# EAGLE board microsd-adapter (EAGLE 7.5.0)
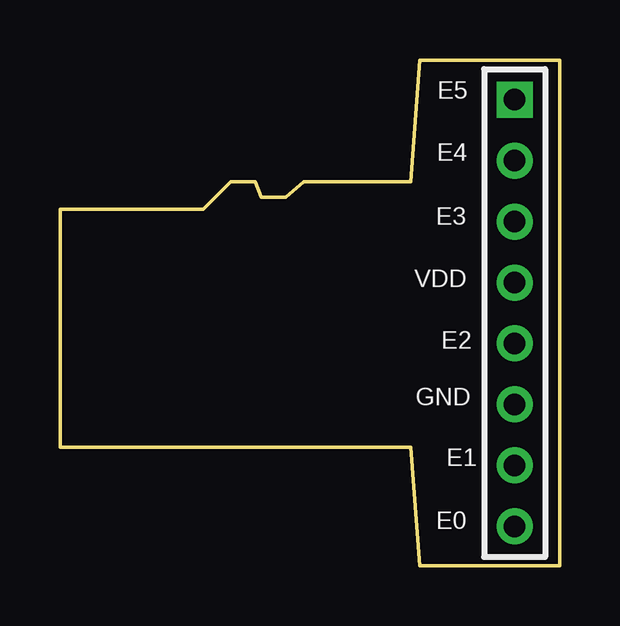
[diagram p0: board, top side]
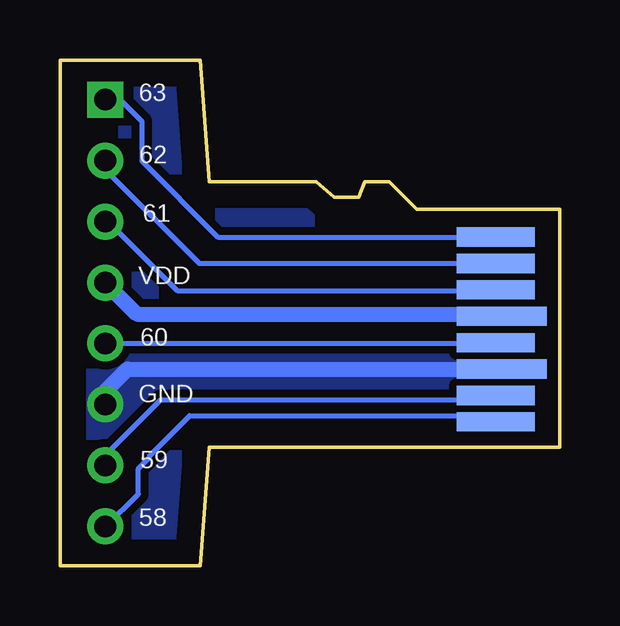
[diagram p1: board, bottom side, seen from below]

Size 20.83 x 21.08 mm. Coordinates in mm from the lower left corner, seen from the top.
Outline: 0,4.95 14.61,4.95 14.99,0 20.83,0 20.83,21.08 14.99,21.08 14.61,16 10.16,16 9.4,15.37 8.38,15.37 8.13,16 7.11,16 5.97,14.86 0,14.86 0,4.95
Copper layers (1*16): Top 0.035mm / dielectric 1.5mm / Bottom 0.035mm
Design rules "default *": minimum track width 10mil, minimum drill 0.61mm, track to track 8mil, track to pad 8mil, pad to pad 8mil, via to via 8mil, smd to smd 8mil, copper to edge 40mil, drill to drill 8mil, minimum pad ring 0mil, minimum via ring 8mil, stop-mask expansion 2mil, vias tented up to drill 19mil, thermal gap 10mil
Net classes: 0 Default: width 0.203 mm, clearance 0.203 mm

## Footprints (pad centres in the part's own frame; a part is rotated, then mirrored left to right if it is on the bottom)
MICROSD_BARE = smd 3.25 x 0.8: 1 0,3.85; 2 0,2.75; 3 0,1.65; 5 0,-0.55; 7 0,-2.75; 8 0,-3.85 | smd 3.75 x 0.8: 4 0.25,0.55; 6 0.25,-1.65
HDR-1x8 = drill 0.9 pad 1.5 square: 1 -8.89,0 | drill 0.9 pad 1.5: 2 -6.35,0; 3 -3.81,0; 4 -1.27,0; 5 1.27,0; 6 3.81,0; 7 6.35,0; 8 8.89,0

## Placement (x,y rotation side)
U1  MICROSD_BARE  [MICROSD_BARE]  2.67,9.86 0 bottom
U2  1X8 CONNECTOR  [HDR-1x8]  18.94,10.54 270 top

## Library data of the parts
U1 U2 = common

## Nets
CLK: U1.5 U2.5
CMD: U1.3 U2.3
DAT0: U1.7 U2.7
DAT1: U1.8 U2.8
DAT2: U1.1 U2.1
DAT3: U1.2 U2.2
GND: U1.6 U2.6
VDD: U1.4 U2.4

## Tracks (layer width: path | path; a pad name or v marks a point on that pad's centre or on a via)
CLK
  Bottom 0.203: U2.5 2.67,9.27 U1.5
CMD
  Bottom 0.203: U2.3 18.94,14.47 15.94,11.48 2.67,11.48 U1.3
DAT0
  Bottom 0.203: U2.7 18.94,4.61 16.62,6.93 2.67,6.93 U1.7
DAT1
  Bottom 0.203: U2.8 18.91,1.65 17.57,3 17.57,4.06 17.09,4.54 17.09,4.6 15.42,6.27 2.67,6.27 U1.8
DAT2
  Bottom 0.203: U2.1 18.32,19.43 17.42,18.53 17.42,16.88 14.25,13.71 U1.1
DAT3
  Bottom 0.203: U2.2 18.94,16.51 15.03,12.61 U1.2
GND
  Bottom 0.635: U2.6 18.94,7.28 18.02,8.21 U1.6
  pour Bottom (isolate 0.33, no thermals): 1.08,6.03 15.6,6.03 15.99,1.08 20.43,1.08 20.51,20 15.99,20 15.61,14.92 10.55,14.92 9.79,14.29 7.65,14.29 7.44,14.81 6.42,13.78 1.08,13.78
VDD
  Bottom 0.635: U2.4 17.63,10.5 2.42,10.5 U1.4

## Text on the board
tPlace: E5 | E4 | E3 | VDD | E2 | GND | E1 | E0
bPlace: 63 | 62 | 61 | VDD | 60 | GND | 59 | 58